# Altium PCB arduino_ext_terminal.PcbDoc (part 1 of 2)
Units mm, origin at the board's own origin, x right, y up, seen from the top; angles counter-clockwise.
Board outline 92.5 x 46.8 mm, 2 copper layers (Top Layer, Bottom Layer), stack 1.036 mm thick; 54 components, 39 nets, 236 pads, 58 vias.
Unrouted connection lines stored in the file: 47.
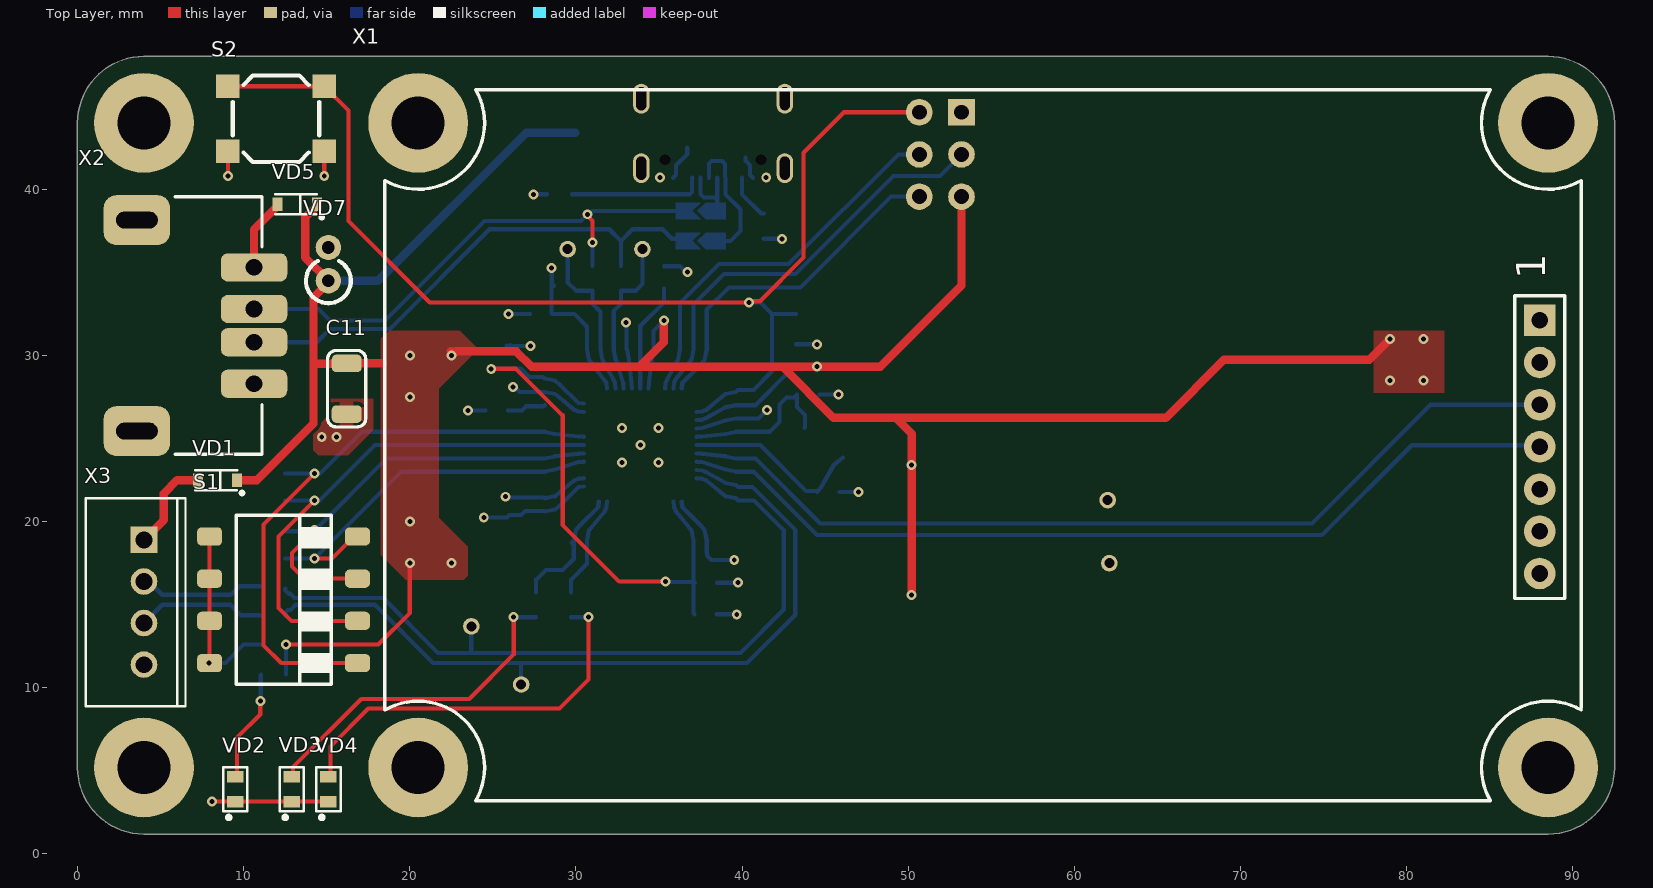
[diagram p0: Top Layer view]
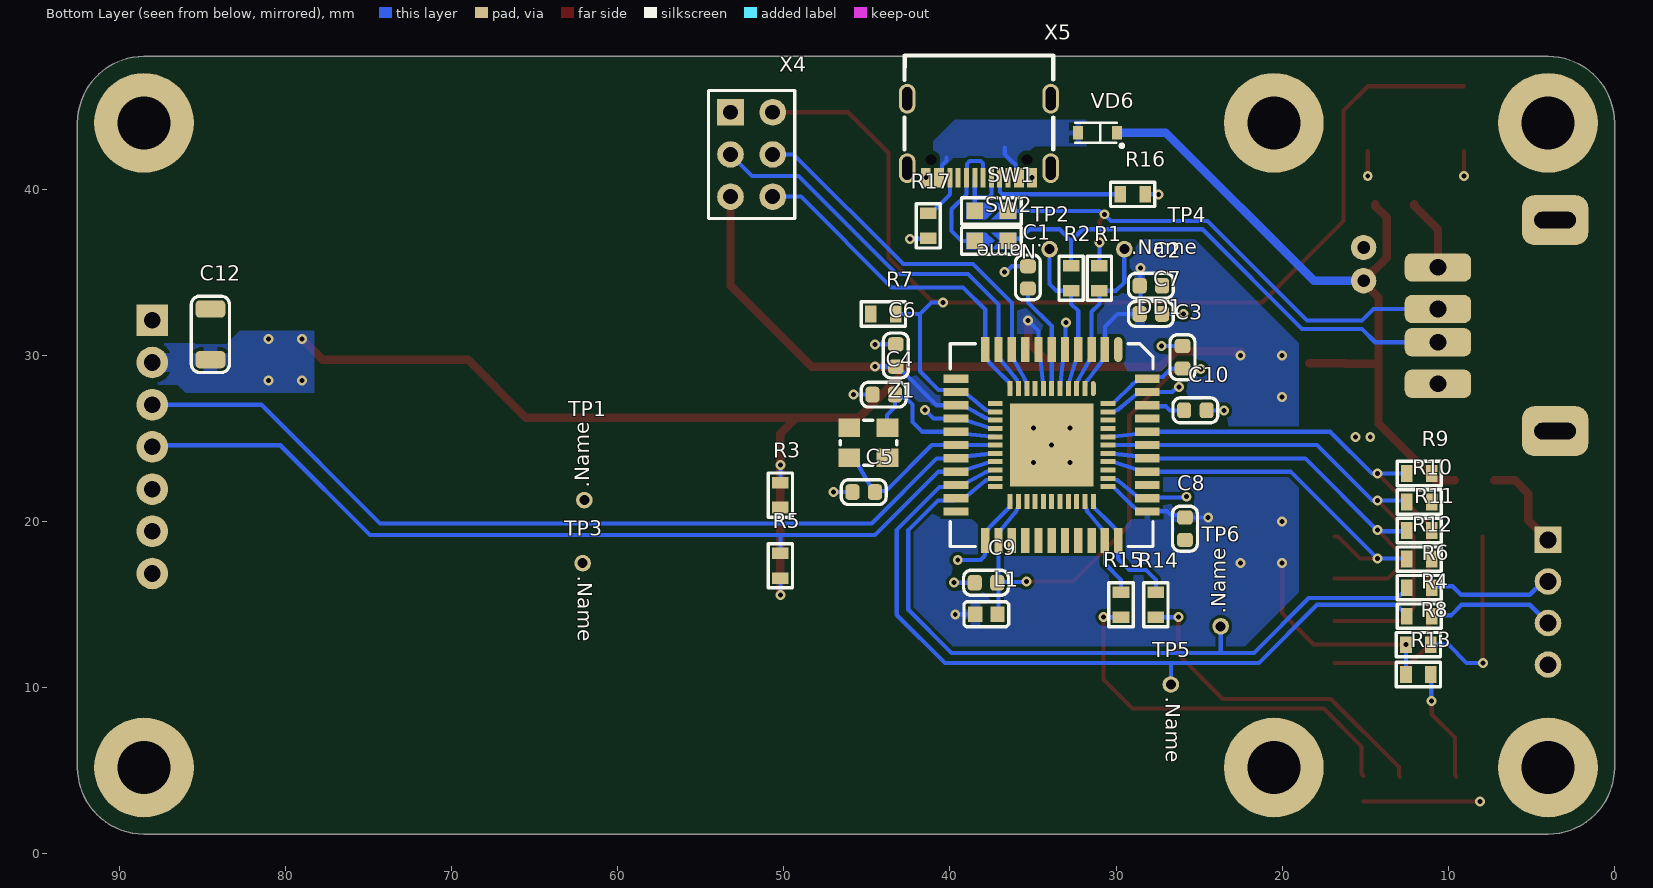
[diagram p1: Bottom Layer view, seen from below]
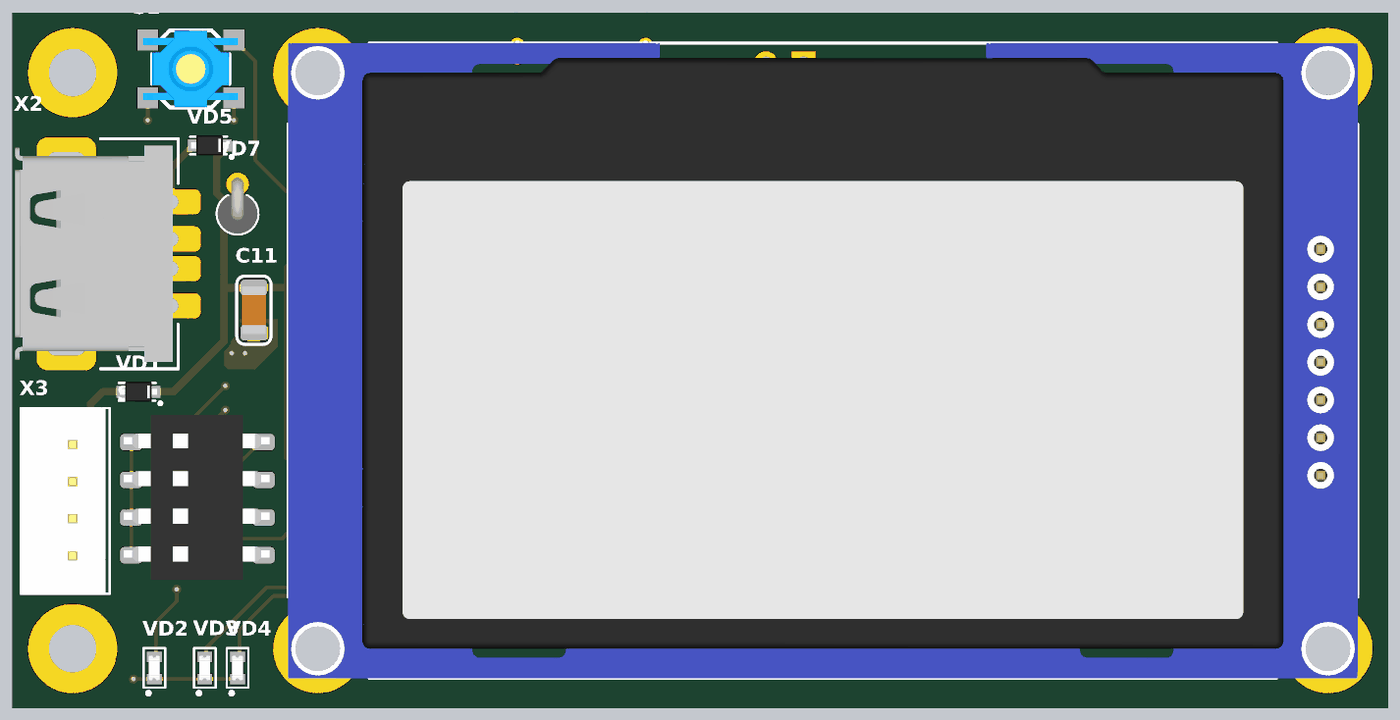
[diagram p3: 3D render of the assembled board from above, using the file's embedded part models]

## Layer stack, top to bottom
Top Solder: solder mask 0.0102, Solder Resist, Dk 3.5
Top Layer: signal copper 0.018
Core 1: core 1, FR4 Tg135, Dk 4.5
Bottom Layer: signal copper 0.018
Bottom Solder: solder mask 0.0102, Solder Resist, Dk 3.5

## Board outline
0,5.2 0,44 cw(c4,44) 4,48 88.5,48 cw(c88.5,44) 92.5,44 92.5,5.2 cw(c88.5,5.2) 88.5,1.2 4,1.2 cw(c4,5.2)

## Design rules (kind name [scope] priority, off if disabled: settings)
AcuteAngle min_acute_angle [OnCopper] p1: minimum=3.50000000000000E+0001 checktracksonly=FALSE // Минимальный угол между примитивами топологии
BoardOutlineClearance board_outline_clearance_std [NOT (OnLayer('Bottom Overlay') OR OnLayer('Top Overlay'))] p1: gap=0.25 ignorepadtopadclearanceinfootprint=FALSE except(0: Arc-SplitContinuation Track-SplitContinuation SMDPad-SplitContinuation THPad-SplitContinuation Via-SplitContinuation Fill-SplitContinuation Poly-SplitContinuation Region-SplitContinuation Text-SplitContinuation) // Отступ элементов топологии от края фрезеруемой печатной платы
Clearance clearance_poly_to_diff [InPolygonClass('FILL') vs InAnyDifferentialPair] p1: gap=0.125 ignorepadtopadclearanceinfootprint=FALSE except(0.2: Arc-Fill Track-Fill SMDPad-SMDPad SMDPad-Fill THPad-Fill Via-Fill Fill-Fill Fill-Poly Poly-Poly Poly-Region Poly-Text; 0.25: Arc-Hole Track-Hole SMDPad-Hole THPad-Hole Via-Hole Fill-Hole Poly-Hole Region-Hole Text-Hole; 0.5: Arc-Poly Track-Poly SMDPad-Poly THPad-Poly Via-Poly) // Отступ полигонов от дифференциальных пар
Clearance clearance_outer_18um_std [OnTopLayer OR OnBottomLayer] p2: gap=0.125 ignorepadtopadclearanceinfootprint=FALSE except(0.2: Arc-Fill Arc-Poly Track-Fill Track-Poly SMDPad-SMDPad SMDPad-Fill SMDPad-Poly THPad-Fill THPad-Poly Via-Fill Via-Poly Fill-Fill Fill-Poly Poly-Poly Poly-Region Poly-Text; 0.25: Arc-Hole Track-Hole SMDPad-Hole THPad-Hole Via-Hole Fill-Hole Poly-Hole Region-Hole Text-Hole) // Зазоры на внешних слоях
Clearance clearance_inner_18um_std [NOT (OnTopLayer Or OnBottomLayer)] p3: gap=0.125 ignorepadtopadclearanceinfootprint=FALSE except(0.2: Arc-Fill Arc-Poly Track-Fill Track-Poly SMDPad-SMDPad SMDPad-Fill SMDPad-Poly THPad-Fill THPad-Poly Via-Fill Via-Poly Fill-Fill Fill-Poly Poly-Poly Poly-Region Poly-Text; 0.25: Arc-Hole Track-Hole SMDPad-Hole THPad-Hole Via-Hole Fill-Hole Poly-Hole Region-Hole Text-Hole) // Зазоры на внутренних слоях
ComponentClearance [All] p1: gap=0 collisioncheckmode=3 verticalgap=0 showdistances=FALSE
DiffPairsRouting diff_pairs_routing [All] p1: maxlimit=0.127 minlimit=0.127 mostfreqgap=0.127 toplayer_minwidth=0.143 toplayer_maxwidth=0.143 toplayer_prefwidth=0.143 bottomlayer_minwidth=0.143 bottomlayer_maxwidth=0.143 bottomlayer_prefwidth=0.143 impedanceprofiledriven=TRUE maxuncoupledlength=12.7 // Правила трассировки дифференциальных пар
HoleSize min_hole_size_std [IsPad] p1: absolutevalues=TRUE maxlimit=5.9 minlimit=0.6 maxpercent=80.000 minpercent=20.000 // Диаметр межслойного переходного отверстия
HoleSize min_hole_size_via_std [IsVia] p2: absolutevalues=TRUE maxlimit=5.9 minlimit=0.3 maxpercent=80.000 minpercent=20.000 // Минимальный диаметр монтажного отверстия
HoleToHoleClearance hole_to_hole_clearance_std [All] p1: gap=0.2 allowstackedmicrovias=FALSE // Минимальное расстояние между краями двух отверстий
MinimumAnnularRing min_via_ar_std [All] p1: minimumring=0.15 // Поясок площадки переходного отверстия (Annular ring VIA)
MinimumAnnularRing min_pad_ar_std [All] p2: minimumring=0.2 // Поясок монтажной контактной площадки (Annular ring PAD)
MinimumSolderMaskSliver min_solder_mask_bridge_std [All] p1: minsoldermaskwidth=0.15 // Мнимальная ширина масочного мостика
PlaneClearance plane_clearance_antipads [InAnyDifferentialPair] p1: clearance=0.5 // Отступ полигона от дифференциальных пар
PlaneClearance plane_clearance_18um_std [All] p2: clearance=0.2 // Отступ полигона (для слоя plane) от элементов топологии
PlaneConnect "plane_connect_to pad<=0.3" [(AsMM(PadXSize_AllLayers)<=0.301) or (AsMM(PadYSize_AllLayers)<=0.301)] p1 off: pad.planeconnectstyle=Relief pad.reliefexpansion=0.2 pad.reliefentries=4 pad.reliefconductorwidth=0.2 pad.reliefairgap=0.2 via.planeconnectstyle=Direct via.reliefexpansion=0.5 via.reliefentries=4 via.reliefconductorwidth=0.2 via.reliefairgap=0.2 // Правила подключения полигонов для падов от 0,3мм и меньше
PlaneConnect "plane_connect_to pad<=0.4" [(AsMM(PadXSize_AllLayers)<=0.401) or (AsMM(PadYSize_AllLayers)<=0.401)] p2 off: pad.planeconnectstyle=Relief pad.reliefexpansion=0.2 pad.reliefentries=4 pad.reliefconductorwidth=0.2 pad.reliefairgap=0.3 via.planeconnectstyle=Direct via.reliefexpansion=0.5 via.reliefentries=4 via.reliefconductorwidth=0.2 via.reliefairgap=0.2 // Правила подключения полигонов для падов от 0,4мм и меньше
PlaneConnect "plane_connect_to pad<=0.6" [(AsMM(PadXSize_AllLayers)<=0.601) or (AsMM(PadYSize_AllLayers)<=0.601)] p3 off: pad.planeconnectstyle=Relief pad.reliefexpansion=0.2 pad.reliefentries=4 pad.reliefconductorwidth=0.3 pad.reliefairgap=0.3 via.planeconnectstyle=Direct via.reliefexpansion=0.5 via.reliefentries=4 via.reliefconductorwidth=0.2 via.reliefairgap=0.2 // Правила подключения полигонов для падов от 0,6мм и меньше
PlaneConnect "plane_connect_to pad<=0.7" [(AsMM(PadXSize_AllLayers)<=0.701) or (AsMM(PadYSize_AllLayers)<=0.701)] p4 off: pad.planeconnectstyle=Relief pad.reliefexpansion=0.6 pad.reliefentries=4 pad.reliefconductorwidth=0.35 pad.reliefairgap=0.3 via.planeconnectstyle=Direct via.reliefexpansion=0.5 via.reliefentries=4 via.reliefconductorwidth=0.2 via.reliefairgap=0.2 // Правила подключения полигонов для падов от 0,7мм и меньше
PlaneConnect "plane_connect_to pad<=0.8" [(AsMM(PadXSize_AllLayers)<=0.801) or (AsMM(PadYSize_AllLayers)<=0.801)] p5 off: pad.planeconnectstyle=Relief pad.reliefexpansion=0.7 pad.reliefentries=4 pad.reliefconductorwidth=0.4 pad.reliefairgap=0.3 via.planeconnectstyle=Direct via.reliefexpansion=0.5 via.reliefentries=4 via.reliefconductorwidth=0.2 via.reliefairgap=0.2 // Правила подключения полигонов для падов от 0,8мм и меньше
PlaneConnect "plane_connect_to pad<=1" [(AsMM(PadXSize_AllLayers)<=1.01) or (AsMM(PadYSize_AllLayers)<=1.01)] p6 off: pad.planeconnectstyle=Relief pad.reliefexpansion=0.8 pad.reliefentries=4 pad.reliefconductorwidth=0.5 pad.reliefairgap=0.3 via.planeconnectstyle=Direct via.reliefexpansion=0.5 via.reliefentries=4 via.reliefconductorwidth=0.2 via.reliefairgap=0.2 // Правила подключения полигонов для падов от 1мм и меньше
PlaneConnect "plane_connect_to pad<=1.3" [(AsMM(PadXSize_AllLayers)<=1.31) or (AsMM(PadYSize_AllLayers)<=1.31)] p7 off: pad.planeconnectstyle=Relief pad.reliefexpansion=1.1 pad.reliefentries=4 pad.reliefconductorwidth=0.65 pad.reliefairgap=0.3 via.planeconnectstyle=Direct via.reliefexpansion=0.5 via.reliefentries=4 via.reliefconductorwidth=0.2 via.reliefairgap=0.2 // Правила подключения полигонов для падов от 1,3мм и меньше
PlaneConnect "plane_connect_to pad<=1.6" [(AsMM(PadXSize_AllLayers)<=1.61) or (AsMM(PadYSize_AllLayers)<=1.61)] p8 off: pad.planeconnectstyle=Relief pad.reliefexpansion=1.4 pad.reliefentries=4 pad.reliefconductorwidth=0.8 pad.reliefairgap=0.3 via.planeconnectstyle=Direct via.reliefexpansion=0.5 via.reliefentries=4 via.reliefconductorwidth=0.2 via.reliefairgap=0.2 // Правила подключения полигонов для падов от 1,6мм и меньше
PlaneConnect "plane_connect_to pad<=1.8" [(AsMM(PadXSize_AllLayers)<=1.81) or (AsMM(PadYSize_AllLayers)<=1.81)] p9 off: pad.planeconnectstyle=Relief pad.reliefexpansion=1.6 pad.reliefentries=4 pad.reliefconductorwidth=0.9 pad.reliefairgap=0.3 via.planeconnectstyle=Direct via.reliefexpansion=0.5 via.reliefentries=4 via.reliefconductorwidth=0.2 via.reliefairgap=0.2 // Правила подключения полигонов для падов от 1,8мм и меньше
PlaneConnect "plane_connect_to pad<=2" [(AsMM(PadXSize_AllLayers)<=2.01) or (AsMM(PadYSize_AllLayers)<=2.01)] p10 off: pad.planeconnectstyle=Relief pad.reliefexpansion=1.8 pad.reliefentries=4 pad.reliefconductorwidth=1 pad.reliefairgap=0.3 via.planeconnectstyle=Direct via.reliefexpansion=0.5 via.reliefentries=4 via.reliefconductorwidth=0.2 via.reliefairgap=0.2 // Правила подключения полигонов для падов от 2мм и меньше
PlaneConnect "plane_connect_to pad<=2.3" [(AsMM(PadXSize_AllLayers)<=2.31) or (AsMM(PadYSize_AllLayers)<=2.31)] p11 off: pad.planeconnectstyle=Relief pad.reliefexpansion=2.1 pad.reliefentries=4 pad.reliefconductorwidth=1.15 pad.reliefairgap=0.3 via.planeconnectstyle=Direct via.reliefexpansion=0.5 via.reliefentries=4 via.reliefconductorwidth=0.2 via.reliefairgap=0.2 // Правила подключения полигонов для падов от 2,3мм и меньше
PlaneConnect "plane_connect_to pad<=2.5" [(AsMM(PadXSize_AllLayers)<=2.51) or (AsMM(PadYSize_AllLayers)<=2.51)] p12 off: pad.planeconnectstyle=Relief pad.reliefexpansion=2.3 pad.reliefentries=4 pad.reliefconductorwidth=1.25 pad.reliefairgap=0.3 via.planeconnectstyle=Direct via.reliefexpansion=0.5 via.reliefentries=4 via.reliefconductorwidth=0.2 via.reliefairgap=0.2 // Правила подключения полигонов для падов от 2,5мм и меньше
PlaneConnect "plane_connect_to pad<=2.7" [(AsMM(PadXSize_AllLayers)<=2.71) or (AsMM(PadYSize_AllLayers)<=2.71)] p13 off: pad.planeconnectstyle=Relief pad.reliefexpansion=2.5 pad.reliefentries=4 pad.reliefconductorwidth=1.35 pad.reliefairgap=0.3 via.planeconnectstyle=Direct via.reliefexpansion=0.5 via.reliefentries=4 via.reliefconductorwidth=0.2 via.reliefairgap=0.2 // Правила подключения полигонов для падов от 2,7мм и меньше
PlaneConnect "plane_connect_to pad<=3" [(AsMM(PadXSize_AllLayers)<=3.01) or (AsMM(PadYSize_AllLayers)<=3.01)] p14 off: pad.planeconnectstyle=Relief pad.reliefexpansion=2.8 pad.reliefentries=4 pad.reliefconductorwidth=1.5 pad.reliefairgap=0.3 via.planeconnectstyle=Direct via.reliefexpansion=0.5 via.reliefentries=4 via.reliefconductorwidth=0.2 via.reliefairgap=0.2 // Правила подключения полигонов для падов от 3мм и меньше
PlaneConnect "plane_connect_to pad<=3.5" [(AsMM(PadXSize_AllLayers)<=3.51) or (AsMM(PadYSize_AllLayers)<=3.51)] p15 off: pad.planeconnectstyle=Relief pad.reliefexpansion=3.3 pad.reliefentries=4 pad.reliefconductorwidth=1.75 pad.reliefairgap=0.4 via.planeconnectstyle=Direct via.reliefexpansion=0.5 via.reliefentries=4 via.reliefconductorwidth=0.2 via.reliefairgap=0.2 // Правила подключения полигонов для падов от 3.5мм и меньше
PlaneConnect "plane_connect_to pad<=4" [(AsMM(PadXSize_AllLayers)<=4.01) or (AsMM(PadYSize_AllLayers)<=4.01)] p16 off: pad.planeconnectstyle=Relief pad.reliefexpansion=3.8 pad.reliefentries=4 pad.reliefconductorwidth=2 pad.reliefairgap=0.4 via.planeconnectstyle=Direct via.reliefexpansion=0.5 via.reliefentries=4 via.reliefconductorwidth=0.2 via.reliefairgap=0.2 // Правила подключения полигонов для падов от 4мм и меньше
PlaneConnect "plane_connect_to pad<=4.5" [(AsMM(PadXSize_AllLayers)<=4.51) or (AsMM(PadYSize_AllLayers)<=4.51)] p17 off: pad.planeconnectstyle=Relief pad.reliefexpansion=4.3 pad.reliefentries=4 pad.reliefconductorwidth=2.25 pad.reliefairgap=0.4 via.planeconnectstyle=Direct via.reliefexpansion=0.5 via.reliefentries=4 via.reliefconductorwidth=0.2 via.reliefairgap=0.2 // Правила подключения полигонов для падов от 4.5мм и меньше
PlaneConnect "plane_connect_to pad<=5" [(AsMM(PadXSize_AllLayers)<=5.01) or (AsMM(PadYSize_AllLayers)<=5.01)] p18 off: pad.planeconnectstyle=Relief pad.reliefexpansion=4.8 pad.reliefentries=4 pad.reliefconductorwidth=2.5 pad.reliefairgap=0.4 via.planeconnectstyle=Direct via.reliefexpansion=0.5 via.reliefentries=4 via.reliefconductorwidth=0.2 via.reliefairgap=0.2 // Правила подключения полигонов для падов от 5мм и меньше
PlaneConnect "plane_connect_to pad<=5.5" [(AsMM(PadXSize_AllLayers)<=5.51) or (AsMM(PadYSize_AllLayers)<=5.51)] p19 off: pad.planeconnectstyle=Relief pad.reliefexpansion=5.3 pad.reliefentries=4 pad.reliefconductorwidth=2.75 pad.reliefairgap=0.4 via.planeconnectstyle=Direct via.reliefexpansion=0.5 via.reliefentries=4 via.reliefconductorwidth=0.2 via.reliefairgap=0.2 // Правила подключения полигонов для падов от 5,5мм и меньше
PlaneConnect "plane_connect_to pad<=6" [(AsMM(PadXSize_AllLayers)<=6.01) or (AsMM(PadYSize_AllLayers)<=6.01)] p20 off: pad.planeconnectstyle=Relief pad.reliefexpansion=5.8 pad.reliefentries=4 pad.reliefconductorwidth=3 pad.reliefairgap=0.5 via.planeconnectstyle=Direct via.reliefexpansion=0.5 via.reliefentries=4 via.reliefconductorwidth=0.2 via.reliefairgap=0.2 // Правила подключения полигонов для падов от 6мм и меньше
PlaneConnect "plane_connect_to pad<=6.5" [(AsMM(PadXSize_AllLayers)<=6.51) or (AsMM(PadYSize_AllLayers)<=6.51)] p21 off: pad.planeconnectstyle=Relief pad.reliefexpansion=6.3 pad.reliefentries=4 pad.reliefconductorwidth=3.25 pad.reliefairgap=0.5 via.planeconnectstyle=Direct via.reliefexpansion=0.5 via.reliefentries=4 via.reliefconductorwidth=0.2 via.reliefairgap=0.2 // Правила подключения полигонов для падов от 6,5мм и меньше
PlaneConnect "plane_connect_to pad<=7" [(AsMM(PadXSize_AllLayers)<=7.01) or (AsMM(PadYSize_AllLayers)<=7.01)] p22 off: pad.planeconnectstyle=Relief pad.reliefexpansion=6.8 pad.reliefentries=4 pad.reliefconductorwidth=3.5 pad.reliefairgap=0.5 via.planeconnectstyle=Direct via.reliefexpansion=0.5 via.reliefentries=4 via.reliefconductorwidth=0.2 via.reliefairgap=0.2 // Правила подключения полигонов для падов от 7мм и меньше
PlaneConnect "plane_connect_to pad<=7.5" [(AsMM(PadXSize_AllLayers)<=7.51) or (AsMM(PadYSize_AllLayers)<=7.51)] p23 off: pad.planeconnectstyle=Relief pad.reliefexpansion=7.3 pad.reliefentries=4 pad.reliefconductorwidth=3.75 pad.reliefairgap=0.5 via.planeconnectstyle=Direct via.reliefexpansion=0.5 via.reliefentries=4 via.reliefconductorwidth=0.2 via.reliefairgap=0.2 // Правила подключения полигонов для падов от 7,5мм и меньше
PlaneConnect "plane_connect_to pad<=8" [(AsMM(PadXSize_AllLayers)<=8.01) or (AsMM(PadYSize_AllLayers)<=8.01)] p24 off: pad.planeconnectstyle=Relief pad.reliefexpansion=7.8 pad.reliefentries=4 pad.reliefconductorwidth=4 pad.reliefairgap=0.5 via.planeconnectstyle=Direct via.reliefexpansion=0.5 via.reliefentries=4 via.reliefconductorwidth=0.2 via.reliefairgap=0.2 // Правила подключения полигонов для падов от 8мм и меньше
PlaneConnect "plane_connect_to pad<=8.5" [(AsMM(PadXSize_AllLayers)<=8.51) or (AsMM(PadYSize_AllLayers)<=8.51)] p25 off: pad.planeconnectstyle=Relief pad.reliefexpansion=8.3 pad.reliefentries=4 pad.reliefconductorwidth=4.25 pad.reliefairgap=0.5 via.planeconnectstyle=Direct via.reliefexpansion=0.5 via.reliefentries=4 via.reliefconductorwidth=0.2 via.reliefairgap=0.2 // Правила подключения полигонов для падов от 8,5мм и меньше
PlaneConnect "plane_connect_to pad<=9" [(AsMM(PadXSize_AllLayers)<=9.01) or (AsMM(PadYSize_AllLayers)<=9.01)] p26 off: pad.planeconnectstyle=Relief pad.reliefexpansion=8.8 pad.reliefentries=4 pad.reliefconductorwidth=4.5 pad.reliefairgap=0.5 via.planeconnectstyle=Direct via.reliefexpansion=0.5 via.reliefentries=4 via.reliefconductorwidth=0.2 via.reliefairgap=0.2 // Правила подключения полигонов для падов от 9мм и меньше
PlaneConnect "plane_connect_to pad<=9.5" [(AsMM(PadXSize_AllLayers)<=9.51) or (AsMM(PadYSize_AllLayers)<=9.51)] p27 off: pad.planeconnectstyle=Relief pad.reliefexpansion=9.3 pad.reliefentries=4 pad.reliefconductorwidth=4.75 pad.reliefairgap=0.5 via.planeconnectstyle=Direct via.reliefexpansion=0.5 via.reliefentries=4 via.reliefconductorwidth=0.2 via.reliefairgap=0.2 // Правила подключения полигонов для падов от 9,5мм и меньше
PlaneConnect "plane_connect_to pad<=10" [(AsMM(PadXSize_AllLayers)<=10.01) or (AsMM(PadYSize_AllLayers)<=10.01)] p28 off: pad.planeconnectstyle=Relief pad.reliefexpansion=9.8 pad.reliefentries=4 pad.reliefconductorwidth=5 pad.reliefairgap=0.5 via.planeconnectstyle=Direct via.reliefexpansion=0.5 via.reliefentries=4 via.reliefconductorwidth=0.2 via.reliefairgap=0.2 // Правила подключения полигонов для падов от 10мм и меньше
PlaneConnect plane_connect_to_pad [All] p29 off: pad.planeconnectstyle=Relief pad.reliefexpansion=0.5 pad.reliefentries=4 pad.reliefconductorwidth=0.2 pad.reliefairgap=0.2 via.planeconnectstyle=Direct via.reliefexpansion=0.5 via.reliefentries=4 via.reliefconductorwidth=0.2 via.reliefairgap=0.2 // Правила подключения полигонов общие
PolygonConnect poly_connect_direct [InPolygonClass('DIRECT')] p1: connectstyle=Direct reliefconductorwidth=0.254 reliefentries=4 polygonreliefangle="90 Angle" airgapwidth=0.254 // Подключение без термобарьеров к полигонам, относящимся к классу DIRECT
PolygonConnect poly_connect_to_pad<=0.3 [(AsMM(PadXSize_AllLayers)<=0.301) or (AsMM(PadYSize_AllLayers)<=0.301)] p2: thpad.connectstyle=Relief thpad.reliefconductorwidth=0.2 thpad.reliefentries=4 thpad.polygonreliefangle="90 Angle" thpad.airgapwidth=0.2 smdpad.connectstyle=Relief smdpad.reliefconductorwidth=0.2 smdpad.reliefentries=4 smdpad.polygonreliefangle="90 Angle" smdpad.airgapwidth=0.2 via.connectstyle=Direct via.reliefconductorwidth=0.254 via.reliefentries=4 via.polygonreliefangle="90 Angle" via.airgapwidth=0.254 // Правила подключения полигонов для падов от 0,3мм и меньше
PolygonConnect poly_connect_to_pad<=0.4 [(AsMM(PadXSize_AllLayers)<=0.401) or (AsMM(PadYSize_AllLayers)<=0.401)] p3: thpad.connectstyle=Relief thpad.reliefconductorwidth=0.26 thpad.reliefentries=4 thpad.polygonreliefangle="90 Angle" thpad.airgapwidth=0.2 smdpad.connectstyle=Relief smdpad.reliefconductorwidth=0.26 smdpad.reliefentries=4 smdpad.polygonreliefangle="90 Angle" smdpad.airgapwidth=0.2 via.connectstyle=Direct via.reliefconductorwidth=0.254 via.reliefentries=4 via.polygonreliefangle="90 Angle" via.airgapwidth=0.254 // Правила подключения полигонов для падов от 0,4 и меньше
PolygonConnect poly_connect_to_pad<=0.6 [(AsMM(PadXSize_AllLayers)<=0.601) or (AsMM(PadYSize_AllLayers)<=0.601)] p4: thpad.connectstyle=Relief thpad.reliefconductorwidth=0.33 thpad.reliefentries=4 thpad.polygonreliefangle="90 Angle" thpad.airgapwidth=0.2 smdpad.connectstyle=Relief smdpad.reliefconductorwidth=0.33 smdpad.reliefentries=4 smdpad.polygonreliefangle="90 Angle" smdpad.airgapwidth=0.2 via.connectstyle=Direct via.reliefconductorwidth=0.254 via.reliefentries=4 via.polygonreliefangle="90 Angle" via.airgapwidth=0.254 // Правила подключения полигонов для падов от 0,6мм и меньше
PolygonConnect poly_connect_to_pad<=0.7 [(AsMM(PadXSize_AllLayers)<=0.701) or (AsMM(PadYSize_AllLayers)<=0.701)] p5: thpad.connectstyle=Relief thpad.reliefconductorwidth=0.46 thpad.reliefentries=4 thpad.polygonreliefangle="90 Angle" thpad.airgapwidth=0.2 smdpad.connectstyle=Relief smdpad.reliefconductorwidth=0.46 smdpad.reliefentries=4 smdpad.polygonreliefangle="90 Angle" smdpad.airgapwidth=0.2 via.connectstyle=Direct via.reliefconductorwidth=0.254 via.reliefentries=4 via.polygonreliefangle="90 Angle" via.airgapwidth=0.254 // Правила подключения полигонов для падов от 0,7мм и меньше
PolygonConnect poly_connect_to_pad<=0.8 [(AsMM(PadXSize_AllLayers)<=0.8)or(AsMM(PadYSize_AllLayers)<=0.8)] p6: thpad.connectstyle=Relief thpad.reliefconductorwidth=0.53 thpad.reliefentries=4 thpad.polygonreliefangle="90 Angle" thpad.airgapwidth=0.3 smdpad.connectstyle=Relief smdpad.reliefconductorwidth=0.53 smdpad.reliefentries=4 smdpad.polygonreliefangle="90 Angle" smdpad.airgapwidth=0.2 via.connectstyle=Direct via.reliefconductorwidth=0.254 via.reliefentries=4 via.polygonreliefangle="90 Angle" via.airgapwidth=0.254 // Правила подключения полигонов для падов от 0,8мм и меньше
PolygonConnect poly_connect_to_pad<=1 [(AsMM(PadXSize_AllLayers)<=1.01)or(AsMM(PadYSize_AllLayers)<=1.01)] p7: thpad.connectstyle=Relief thpad.reliefconductorwidth=0.6 thpad.reliefentries=4 thpad.polygonreliefangle="90 Angle" thpad.airgapwidth=0.3 smdpad.connectstyle=Relief smdpad.reliefconductorwidth=0.6 smdpad.reliefentries=4 smdpad.polygonreliefangle="90 Angle" smdpad.airgapwidth=0.2 via.connectstyle=Direct via.reliefconductorwidth=0.254 via.reliefentries=4 via.polygonreliefangle="90 Angle" via.airgapwidth=0.254 // Правила подключения полигонов для падов от 1мм и меньше
PolygonConnect poly_connect_to_pad<=1.3 [(AsMM(PadXSize_AllLayers)<=1.31)or(AsMM(PadYSize_AllLayers)<=1.31)] p8: thpad.connectstyle=Relief thpad.reliefconductorwidth=0.66 thpad.reliefentries=4 thpad.polygonreliefangle="90 Angle" thpad.airgapwidth=0.3 smdpad.connectstyle=Relief smdpad.reliefconductorwidth=0.86 smdpad.reliefentries=4 smdpad.polygonreliefangle="90 Angle" smdpad.airgapwidth=0.2 via.connectstyle=Direct via.reliefconductorwidth=0.254 via.reliefentries=4 via.polygonreliefangle="90 Angle" via.airgapwidth=0.254 // Правила подключения полигонов для падов от 1,3мм и меньше
PolygonConnect poly_connect_to_pad<=1.6 [(AsMM(PadXSize_AllLayers)<=1.61)or(AsMM(PadYSize_AllLayers)<=1.61)] p9: thpad.connectstyle=Relief thpad.reliefconductorwidth=0.8 thpad.reliefentries=4 thpad.polygonreliefangle="90 Angle" thpad.airgapwidth=0.3 smdpad.connectstyle=Relief smdpad.reliefconductorwidth=1 smdpad.reliefentries=4 smdpad.polygonreliefangle="90 Angle" smdpad.airgapwidth=0.2 via.connectstyle=Direct via.reliefconductorwidth=0.254 via.reliefentries=4 via.polygonreliefangle="90 Angle" via.airgapwidth=0.254 // Правила подключения полигонов для падов от 1,6мм и меньше
PolygonConnect poly_connect_to_pad<=1.8 [(AsMM(PadXSize_AllLayers)<=1.8)or(AsMM(PadYSize_AllLayers)<=1.8)] p10: thpad.connectstyle=Relief thpad.reliefconductorwidth=1 thpad.reliefentries=4 thpad.polygonreliefangle="90 Angle" thpad.airgapwidth=0.3 smdpad.connectstyle=Relief smdpad.reliefconductorwidth=1.2 smdpad.reliefentries=4 smdpad.polygonreliefangle="90 Angle" smdpad.airgapwidth=0.2 via.connectstyle=Direct via.reliefconductorwidth=0.254 via.reliefentries=4 via.polygonreliefangle="90 Angle" via.airgapwidth=0.254 // Правила подключения полигонов для падов от 1,8мм и меньше
PolygonConnect poly_connect_to_pad<=2 [(AsMM(PadXSize_AllLayers)<=2.01)or(AsMM(PadYSize_AllLayers)<=2.01)] p11: thpad.connectstyle=Relief thpad.reliefconductorwidth=1.1 thpad.reliefentries=4 thpad.polygonreliefangle="90 Angle" thpad.airgapwidth=0.3 smdpad.connectstyle=Relief smdpad.reliefconductorwidth=1.4 smdpad.reliefentries=4 smdpad.polygonreliefangle="90 Angle" smdpad.airgapwidth=0.2 via.connectstyle=Direct via.reliefconductorwidth=0.254 via.reliefentries=4 via.polygonreliefangle="90 Angle" via.airgapwidth=0.254 // Правила подключения полигонов для падов от 2мм и меньше
PolygonConnect poly_connect_to_pad<=2.3 [(AsMM(PadXSize_AllLayers)<=2.31)or(AsMM(PadYSize_AllLayers)<=2.31)] p12: thpad.connectstyle=Relief thpad.reliefconductorwidth=1.2 thpad.reliefentries=4 thpad.polygonreliefangle="90 Angle" thpad.airgapwidth=0.3 smdpad.connectstyle=Relief smdpad.reliefconductorwidth=1.4 smdpad.reliefentries=4 smdpad.polygonreliefangle="90 Angle" smdpad.airgapwidth=0.2 via.connectstyle=Direct via.reliefconductorwidth=0.254 via.reliefentries=4 via.polygonreliefangle="90 Angle" via.airgapwidth=0.254 // Правила подключения полигонов для падов от 2,3мм и меньше
PolygonConnect poly_connect_to_pad<=2.5 [(AsMM(PadXSize_AllLayers)<=2.51)or(AsMM(PadYSize_AllLayers)<=2.51)] p13: thpad.connectstyle=Relief thpad.reliefconductorwidth=1.2 thpad.reliefentries=4 thpad.polygonreliefangle="90 Angle" thpad.airgapwidth=0.3 smdpad.connectstyle=Relief smdpad.reliefconductorwidth=1.4 smdpad.reliefentries=4 smdpad.polygonreliefangle="90 Angle" smdpad.airgapwidth=0.2 via.connectstyle=Direct via.reliefconductorwidth=0.254 via.reliefentries=4 via.polygonreliefangle="90 Angle" via.airgapwidth=0.254 // Правила подключения полигонов для падов от 2,5мм и меньше
PolygonConnect poly_connect_to_pad<=2.7 [(AsMM(PadXSize_AllLayers)<=2.71)or(AsMM(PadYSize_AllLayers)<=2.71)] p14: thpad.connectstyle=Relief thpad.reliefconductorwidth=1.4 thpad.reliefentries=4 thpad.polygonreliefangle="90 Angle" thpad.airgapwidth=0.3 smdpad.connectstyle=Relief smdpad.reliefconductorwidth=1.6 smdpad.reliefentries=4 smdpad.polygonreliefangle="90 Angle" smdpad.airgapwidth=0.2 via.connectstyle=Direct via.reliefconductorwidth=0.254 via.reliefentries=4 via.polygonreliefangle="90 Angle" via.airgapwidth=0.254 // Правила подключения полигонов для падов от 2,7мм и меньше
PolygonConnect poly_connect_to_pad<=3 [(AsMM(PadXSize_AllLayers)<=3.01)or(AsMM(PadYSize_AllLayers)<=3.01)] p15: thpad.connectstyle=Relief thpad.reliefconductorwidth=1.6 thpad.reliefentries=4 thpad.polygonreliefangle="90 Angle" thpad.airgapwidth=0.3 smdpad.connectstyle=Relief smdpad.reliefconductorwidth=1.8 smdpad.reliefentries=4 smdpad.polygonreliefangle="90 Angle" smdpad.airgapwidth=0.2 via.connectstyle=Direct via.reliefconductorwidth=0.254 via.reliefentries=4 via.polygonreliefangle="90 Angle" via.airgapwidth=0.254 // Правила подключения полигонов для падов от 3мм и меньше
PolygonConnect poly_connect_to_pad<=3.5 [(AsMM(PadXSize_AllLayers)<=3.51)or(AsMM(PadYSize_AllLayers)<=3.51)] p16: thpad.connectstyle=Relief thpad.reliefconductorwidth=1.8 thpad.reliefentries=4 thpad.polygonreliefangle="90 Angle" thpad.airgapwidth=0.4 smdpad.connectstyle=Relief smdpad.reliefconductorwidth=2 smdpad.reliefentries=4 smdpad.polygonreliefangle="90 Angle" smdpad.airgapwidth=0.3 via.connectstyle=Direct via.reliefconductorwidth=0.254 via.reliefentries=4 via.polygonreliefangle="90 Angle" via.airgapwidth=0.254 // Правила подключения полигонов для падов от 3,5мм и меньше
PolygonConnect poly_connect_to_pad<=4 [(AsMM(PadXSize_AllLayers)<=4.01)or(AsMM(PadYSize_AllLayers)<=4.01)] p17: thpad.connectstyle=Relief thpad.reliefconductorwidth=2.1 thpad.reliefentries=4 thpad.polygonreliefangle="90 Angle" thpad.airgapwidth=0.4 smdpad.connectstyle=Relief smdpad.reliefconductorwidth=2.3 smdpad.reliefentries=4 smdpad.polygonreliefangle="90 Angle" smdpad.airgapwidth=0.3 via.connectstyle=Direct via.reliefconductorwidth=0.254 via.reliefentries=4 via.polygonreliefangle="90 Angle" via.airgapwidth=0.254 // Правила подключения полигонов для падов от 4мм и меньше
PolygonConnect poly_connect_to_pad<=4.5 [(AsMM(PadXSize_AllLayers)<=4.51)or(AsMM(PadYSize_AllLayers)<=4.51)] p18: thpad.connectstyle=Relief thpad.reliefconductorwidth=2.35 thpad.reliefentries=4 thpad.polygonreliefangle="90 Angle" thpad.airgapwidth=0.4 smdpad.connectstyle=Relief smdpad.reliefconductorwidth=2.55 smdpad.reliefentries=4 smdpad.polygonreliefangle="90 Angle" smdpad.airgapwidth=0.3 via.connectstyle=Direct via.reliefconductorwidth=0.254 via.reliefentries=4 via.polygonreliefangle="90 Angle" via.airgapwidth=0.254 // Правила подключения полигонов для падов от 4.5мм и меньше
PolygonConnect poly_connect_to_pad<=5 [(AsMM(PadXSize_AllLayers)<=5.01)or(AsMM(PadYSize_AllLayers)<=5.01)] p19: thpad.connectstyle=Relief thpad.reliefconductorwidth=2.6 thpad.reliefentries=4 thpad.polygonreliefangle="90 Angle" thpad.airgapwidth=0.4 smdpad.connectstyle=Relief smdpad.reliefconductorwidth=2.8 smdpad.reliefentries=4 smdpad.polygonreliefangle="90 Angle" smdpad.airgapwidth=0.3 via.connectstyle=Direct via.reliefconductorwidth=0.254 via.reliefentries=4 via.polygonreliefangle="90 Angle" via.airgapwidth=0.254 // Правила подключения полигонов для падов от 5мм и меньше
PolygonConnect poly_connect_to_pad<=5.5 [(AsMM(PadXSize_AllLayers)<=5.51)or(AsMM(PadYSize_AllLayers)<=5.51)] p20: thpad.connectstyle=Relief thpad.reliefconductorwidth=2.85 thpad.reliefentries=4 thpad.polygonreliefangle="90 Angle" thpad.airgapwidth=0.4 smdpad.connectstyle=Relief smdpad.reliefconductorwidth=3.05 smdpad.reliefentries=4 smdpad.polygonreliefangle="90 Angle" smdpad.airgapwidth=0.3 via.connectstyle=Direct via.reliefconductorwidth=0.254 via.reliefentries=4 via.polygonreliefangle="90 Angle" via.airgapwidth=0.254 // Правила подключения полигонов для падов от 5.5мм и меньше
PolygonConnect poly_connect_to_pad<=6 [(AsMM(PadXSize_AllLayers)<=6.01)or(AsMM(PadYSize_AllLayers)<=6.01)] p21: thpad.connectstyle=Relief thpad.reliefconductorwidth=3.1 thpad.reliefentries=4 thpad.polygonreliefangle="90 Angle" thpad.airgapwidth=0.5 smdpad.connectstyle=Relief smdpad.reliefconductorwidth=3.3 smdpad.reliefentries=4 smdpad.polygonreliefangle="90 Angle" smdpad.airgapwidth=0.4 via.connectstyle=Direct via.reliefconductorwidth=0.254 via.reliefentries=4 via.polygonreliefangle="90 Angle" via.airgapwidth=0.254 // Правила подключения полигонов для падов от 6мм и меньше
PolygonConnect poly_connect_to_pad<=6.5 [(AsMM(PadXSize_AllLayers)<=6.51)or(AsMM(PadYSize_AllLayers)<=6.51)] p22: thpad.connectstyle=Relief thpad.reliefconductorwidth=3.4 thpad.reliefentries=4 thpad.polygonreliefangle="90 Angle" thpad.airgapwidth=0.5 smdpad.connectstyle=Relief smdpad.reliefconductorwidth=3.6 smdpad.reliefentries=4 smdpad.polygonreliefangle="90 Angle" smdpad.airgapwidth=0.4 via.connectstyle=Direct via.reliefconductorwidth=0.254 via.reliefentries=4 via.polygonreliefangle="90 Angle" via.airgapwidth=0.254 // Правила подключения полигонов для падов от 6,5мм и меньше
PolygonConnect poly_connect_to_pad<=7 [(AsMM(PadXSize_AllLayers)<7.01)or(AsMM(PadYSize_AllLayers)<=7.01)] p23: thpad.connectstyle=Relief thpad.reliefconductorwidth=3.6 thpad.reliefentries=4 thpad.polygonreliefangle="90 Angle" thpad.airgapwidth=0.5 smdpad.connectstyle=Relief smdpad.reliefconductorwidth=3.8 smdpad.reliefentries=4 smdpad.polygonreliefangle="90 Angle" smdpad.airgapwidth=0.4 via.connectstyle=Direct via.reliefconductorwidth=0.254 via.reliefentries=4 via.polygonreliefangle="90 Angle" via.airgapwidth=0.254 // Правила подключения полигонов для падов от 7мм и меньше
PolygonConnect poly_connect_to_pad<=7.5 [(AsMM(PadXSize_AllLayers)<7.51)or(AsMM(PadYSize_AllLayers)<=7.51)] p24: thpad.connectstyle=Relief thpad.reliefconductorwidth=3.9 thpad.reliefentries=4 thpad.polygonreliefangle="90 Angle" thpad.airgapwidth=0.5 smdpad.connectstyle=Relief smdpad.reliefconductorwidth=4.1 smdpad.reliefentries=4 smdpad.polygonreliefangle="90 Angle" smdpad.airgapwidth=0.4 via.connectstyle=Direct via.reliefconductorwidth=0.254 via.reliefentries=4 via.polygonreliefangle="90 Angle" via.airgapwidth=0.254 // Правила подключения полигонов для падов от 7,5мм и меньше
PolygonConnect poly_connect_to_pad<=8 [(AsMM(PadXSize_AllLayers)<8.01)or(AsMM(PadYSize_AllLayers)<=8.01)] p25: thpad.connectstyle=Relief thpad.reliefconductorwidth=4.15 thpad.reliefentries=4 thpad.polygonreliefangle="90 Angle" thpad.airgapwidth=0.5 smdpad.connectstyle=Relief smdpad.reliefconductorwidth=4.35 smdpad.reliefentries=4 smdpad.polygonreliefangle="90 Angle" smdpad.airgapwidth=0.5 via.connectstyle=Direct via.reliefconductorwidth=0.254 via.reliefentries=4 via.polygonreliefangle="90 Angle" via.airgapwidth=0.254 // Правила подключения полигонов для падов от 8мм и меньше
PolygonConnect poly_connect_to_pad<=8.5 [(AsMM(PadXSize_AllLayers)<8.51)or(AsMM(PadYSize_AllLayers)<=8.51)] p26: thpad.connectstyle=Relief thpad.reliefconductorwidth=4.4 thpad.reliefentries=4 thpad.polygonreliefangle="90 Angle" thpad.airgapwidth=0.5 smdpad.connectstyle=Relief smdpad.reliefconductorwidth=4.6 smdpad.reliefentries=4 smdpad.polygonreliefangle="90 Angle" smdpad.airgapwidth=0.4 via.connectstyle=Direct via.reliefconductorwidth=0.254 via.reliefentries=4 via.polygonreliefangle="90 Angle" via.airgapwidth=0.254 // Правила подключения полигонов для падов от 8,5мм и меньше
PolygonConnect poly_connect_to_pad<=9 [(AsMM(PadXSize_AllLayers)<9.01)or(AsMM(PadYSize_AllLayers)<=9.01)] p27: thpad.connectstyle=Relief thpad.reliefconductorwidth=4.7 thpad.reliefentries=4 thpad.polygonreliefangle="90 Angle" thpad.airgapwidth=0.5 smdpad.connectstyle=Relief smdpad.reliefconductorwidth=4.9 smdpad.reliefentries=4 smdpad.polygonreliefangle="90 Angle" smdpad.airgapwidth=0.4 via.connectstyle=Direct via.reliefconductorwidth=0.254 via.reliefentries=4 via.polygonreliefangle="90 Angle" via.airgapwidth=0.254 // Правила подключения полигонов для падов от 9мм и меньше
PolygonConnect poly_connect_to_pad<=9.5 [(AsMM(PadXSize_AllLayers)<9.51)or(AsMM(PadYSize_AllLayers)<=9.51)] p28: thpad.connectstyle=Relief thpad.reliefconductorwidth=5 thpad.reliefentries=4 thpad.polygonreliefangle="90 Angle" thpad.airgapwidth=0.5 smdpad.connectstyle=Relief smdpad.reliefconductorwidth=5.2 smdpad.reliefentries=4 smdpad.polygonreliefangle="90 Angle" smdpad.airgapwidth=0.4 via.connectstyle=Direct via.reliefconductorwidth=0.254 via.reliefentries=4 via.polygonreliefangle="90 Angle" via.airgapwidth=0.254 // Правила подключения полигонов для падов от 9,5мм и меньше
PolygonConnect poly_connect_to_pad<=10 [(AsMM(PadXSize_AllLayers)<7.51)or(AsMM(PadYSize_AllLayers)<=7.51)] p29: thpad.connectstyle=Relief thpad.reliefconductorwidth=5.2 thpad.reliefentries=4 thpad.polygonreliefangle="90 Angle" thpad.airgapwidth=0.5 smdpad.connectstyle=Relief smdpad.reliefconductorwidth=5.4 smdpad.reliefentries=4 smdpad.polygonreliefangle="90 Angle" smdpad.airgapwidth=0.4 via.connectstyle=Direct via.reliefconductorwidth=0.254 via.reliefentries=4 via.polygonreliefangle="90 Angle" via.airgapwidth=0.254 // Правила подключения полигонов для падов от 10мм и меньше
PolygonConnect poly_connect_to_pad [All] p30: thpad.connectstyle=Relief thpad.reliefconductorwidth=0.25 thpad.reliefentries=4 thpad.polygonreliefangle="90 Angle" thpad.airgapwidth=0.2 smdpad.connectstyle=Relief smdpad.reliefconductorwidth=0.25 smdpad.reliefentries=4 smdpad.polygonreliefangle="90 Angle" smdpad.airgapwidth=0.2 via.connectstyle=Direct via.reliefconductorwidth=0.25 via.reliefentries=4 via.polygonreliefangle="90 Angle" via.airgapwidth=0.2 // Правила подключения полигонов общие
RoutingCorners [All] p1 off: cornerstyle=45-Degree minsetback=2.5 maxsetback=2.5
RoutingVias [All] p1: holewidth=0.3 width=0.6 viastyle="Through Hole" minholewidth=0.3 minwidth=0.6 maxholewidth=5.9 maxwidth=6.4
SilkToSilkClearance silk_to_silk_clearance_std [All] p1 off: silktosilkclearance=0.15 // Отступ текста шелкографии от других примитивов шелкографии
SilkToSolderMaskClearance silk_to_solder_mask_clearance_std [IsPad] p1 off: minsilkscreentomaskgap=0.15 clearancetoexposedcopper=FALSE // Минимальное расстояние между элементами шелкографии и вскрытой медью
SolderMaskExpansion solder_mask_expansion_std [All] p1: expansion=0.05 istentingtop=FALSE // Припуск паяльной масски
UnRoutedNet [All] p1: checkbadconnections=TRUE
Width width_18um_std [All] p1: maxlimit=10 minlimit=0.125 preferedwidth=0.15 checkconnectedcopper=TRUE // Ширина проводников (общая)
19 further rules are at their usual default settings.

## Components (designator, comment, footprint, x,y, rotation, side; value= is the part's Value field where it differs from the comment)
C1 "1мк" C0603 35.3,34.7 r270 bottom
C2 "4,7мк" C0603 27.9,34.2 r0 bottom
C3 "0,1мк" C0603 26,29.9 r270 bottom
C4 "22" C0603 43.981,27.649 r0 bottom
C5 "22" C0603 45.183,21.78 r0 bottom
C6 "0,1мк" C0603 43.25,30 r270 bottom
C7 "0,1мк" C0603 27.9,32.5 r0 bottom
C8 "0,1мк" C0603 25.85,19.575 r90 bottom
C9 "0,1мк" C0603 37.825,16.325 r180 bottom
C10 "0,1мк" C0603 25.225,26.7 r0 bottom
C11 "0,033мк" C1206 16.2,28 r90 top
C12 "0,033мк" C1206 84.5,31.275 r90 bottom
DD1 "ATmega32u4" UNIVERSAL_ATMEGA32U4 33.869,24.609 r270 bottom
L1 "BLM18PG181SN1D" L0603 37.8,14.425 r0 bottom
R1 "22" R0603 31,34.65 r270 bottom
R2 "22" R0603 32.7,34.65 r270 bottom
R3 "10к" R0603 50.2,21.6 r90 bottom
R4 "120" R0603 11.75,14.317 r0 bottom
R5 "10к" R0603 50.2,17.35 r270 bottom
R6 "120" R0603 11.75,16.033 r0 bottom
R7 "10к" R0603 44,32.5 r0 bottom
R8 "1к" R0603 11.8,12.6 r0 bottom
R9 "10к" R0603 11.75,22.9 r0 bottom
R10 "10к" R0603 11.75,21.183 r0 bottom
R11 "10к" R0603 11.75,19.467 r0 bottom
R12 "10к" R0603 11.75,17.75 r0 bottom
R13 "510" R0603 11.8,10.8 r0 bottom
R14 "510" R0603 27.6,15 r270 bottom
R15 "510" R0603 29.7,15 r270 bottom
R16 "5,1к" R0603 29,39.7 r180 bottom
R17 "5,1к" R0603 41.3,37.8 r270 bottom
S1 "" A6S-4102-H 12.4,15.3 r180 top
S2 "IT-1187" it-1187 11.95,44.25 r0 top
SW1 "" JUMPER_SOLDERED_3x1 37.5,38.7 r180 bottom
SW2 "" JUMPER_SOLDERED_3x1 37.5,36.9 r180 bottom
TP1 "SCL" TP_0,6X1 62,21.3 r90 bottom
TP2 "USB_Dp" TP_0,6X1 34,36.4 r0 bottom
TP3 "SDA" TP_0,6X1 62.1,17.5 r270 bottom
TP4 "USB_Dn" TP_0,6X1 29.5,36.4 r180 bottom
TP5 "RX" TP_0,6X1 26.7,10.2 r270 bottom
TP6 "TX" TP_0,6X1 23.7,13.7 r90 bottom
VD1 "1N5817WS" SOD323 8,22.5 r180 top
VD2 "Зеленый светодиод" VD0603 9.5,3.9 r270 top
VD3 "Синий светодиод" VD0603 12.9,3.9 r270 top
VD4 "Синий светодиод" VD0603 15.1,3.9 r270 top
VD5 "1N5817WS" SOD323 12.8,39.1 r180 top
VD6 "1N5817WS" SOD323 31.55,43.4 r0 bottom
VD7 "1N4734A" "DO-41 Vertical" 15.1,34.5 r0 top
X1 "OLED2.42" OLED2.42-PLS2.54-1x7 54.5,24.6 r270 top locked
X2 "" USB-A 7.1,31.8 r270 top
X3 "DS1069-4M (CWF-4)" CWF-4 4,18.9 r0 top
X4 "PLS 3 x 2" pls-2,54-3x2-tht-v 53.2,44.64 r270 bottom
X5 "USB Type-C" USB4105-15-A-120 38.25,48.055 r0 bottom
Z1 "16 MГц" QSMD3.2x2.5 44.9,24.75 r180 bottom

## Footprints (in the part's own frame and the unit in brackets; to place one, negate y for a bottom-side part, rotate by r counter-clockwise, add the part's x,y. Pads: shape width x height; smd on the part's side, far side on the other; paste and mask are expansions set on the pad)
A6S-4102-H [mm]
  rrect50% 1.5x1.1 smd: 1(-4.45,3.81) 2(4.45,3.81) 3(-4.45,1.27) 4(4.45,1.27) 5(-4.45,-1.27) 6(4.45,-1.27) 7(-4.45,-3.81) 8(4.45,-3.81)
  silkscreen extent -2.87,-5.08 2.86,5.08, body extent -4.85,-5.64 4.95,5.46, height 3.7
C0603 [mm] "Chip Capacitor, 2-Leads, Body 1,60x0,80mm, IPC Medium Density"
  rrect50% 0.85x0.95 smd: 1(-0.675,0) 2(0.675,0)
  Top Layer pour cut-out: -0.254,0.5 -0.254,-0.5 0.254,-0.5 0.254,0.5
  silkscreen extent -1.35,-0.75 1.35,0.75, body extent -0.85,-0.45 0.85,0.45, height 0.9
C1206 [mm] "Chip Capacitor, 2-Leads, Body 3,20x1,60mm, IPC Medium Density"
  rrect50% 1.05x1.8 smd: 1(-1.525,0) 2(1.525,0)
  Top Layer pour cut-out: -0.6,0.95 -0.6,-0.95 0.6,-0.95 0.6,0.95
  silkscreen extent -2.3,-1.15 2.3,1.15, body extent -1.6,-0.8 1.6,0.8, height 1.25
CWF-4 [mm]
  rect 1.6x1.6 hole 1: 1(0,0)
  round 1.6 hole 1: 2(0,-2.5) 3(0,-5) 4(0,-7.5)
  silkscreen extent -3.5,-10 2.5,2.5, body extent -3.55,-9.95 2.2,2.45, height 7
"DO-41 Vertical" [mil]
  round 60 hole 30: 1(0,78.74) 2(0,0)
  silkscreen extent -53,-53 53,47, body extent -53,-53 53,96, height 281
it-1187 [mm]
  rect 1.4x1.4 smd: 1(-2.9,1.95) 1(2.9,1.95) 2(-2.9,-1.95) 2(2.9,-1.95)
  silkscreen extent -2.6,-2.6 2.6,2.6, body extent -3.2,-2.6 3.2,2.6, height 1.5
JUMPER_SOLDERED_3x1 [mm]
  rect 1x1 smd: 1(-1,0) 2(1,0)
  Top Layer region: -1.5,0.5 -0.3,0.5 0.2,0 -0.3,-0.5 -1.5,-0.5
  Top Layer region: 1.5,0.5 0,0.5 0.5,0 0,-0.5 1.5,-0.5
  silkscreen extent -1.8,-0.8 1.8,0.8
L0603 [mm] "Chip Inductor, 2-Leads, Body 1,60x0,80mm, IPC Medium Density"
  rect 0.85x0.95 smd: 1(-0.675,0) 2(0.675,0)
  silkscreen extent -1.35,-0.75 1.35,0.75, body extent -0.85,-0.45 0.85,0.45, height 0.9
OLED2.42-PLS2.54-1x7 [mm] "OLED 2.42inc, PLS2.54-1x7"
  round 6 hole 3.2: 0(-19.4,34) 0(-19.4,-34) 0(19.4,34) 0(19.4,-34)
  rect 1.9x1.9 hole 1: 1(-7.52,33.5)
  round 1.9 hole 1: 2(-4.98,33.5) 3(-2.44,33.5) 4(0.1,33.5) 5(2.64,33.5) 6(5.18,33.5) 7(7.72,33.5)
  silkscreen extent -21.4,-36 21.4,36, body extent -21.39,-36 21.41,36, height 7.44
pls-2,54-3x2-tht-v [mm]
  round 1.6 hole 0.9: 1(5.08,2.54) 2(5.08,0) 3(2.54,2.54) 4(2.54,0) 5(0,2.54)
  rect 1.6x1.6 hole 0.9: 6(0,0)
  silkscreen extent -1.31,-1.33 6.39,3.87
QSMD3.2x2.5 [mm]
  rect 1.3x1.1 smd: 1(-1.15,-0.9) 2(1.15,0.9) ""(-1.15,0.9) ""(1.15,-0.9)
  silkscreen extent -1.7,-1.35 1.7,1.35, body extent -1.64,-1.26 1.57,1.24, height 0.81
R0603 [mm]
  rect 0.7x1 smd: 1(-0.75,0) 2(0.75,0)
  silkscreen extent -1.33,-0.73 1.33,0.73, body extent -0.8,-0.43 0.8,0.43, height 0.45
SOD323 [mm]
  rect 0.6x0.8 smd: 1(-1.6,0) 2(0.75,0)
  silkscreen extent -2,-0.6 0.9,0.87, body extent -1.68,-0.68 0.82,0.67, height 1
TP_0,6X1 [mm]
  round 1 hole 0.6: 1(0,0)
UNIVERSAL_ATMEGA32U4 [mm]
  oval 1.5x0.5 smd: 1(-5.75,4)
  oval 0.9x0.3 smd: 1(-3.4,2.5)
  rect 1.5x0.5 smd: 2(-5.75,3.2) 3(-5.75,2.4) 4(-5.75,1.6) 5(-5.75,0.8) 6(-5.75,0) 7(-5.75,-0.8) 8(-5.75,-1.6) 9(-5.75,-2.4) 10(-5.75,-3.2) 11(-5.75,-4) 23(5.75,-4) 24(5.75,-3.2) 25(5.75,-2.4) 26(5.75,-1.6) 27(5.75,-0.8) 28(5.75,0) 29(5.75,0.8) 30(5.75,1.6) 31(5.75,2.4) 32(5.75,3.2) 33(5.75,4)
  rect 0.9x0.3 smd: 2(-3.4,2) 3(-3.4,1.5) 4(-3.4,1) 5(-3.4,0.5) 6(-3.4,0) 7(-3.4,-0.5) 8(-3.4,-1) 9(-3.4,-1.5) 10(-3.4,-2) 11(-3.4,-2.5) 23(3.4,-2.5) 24(3.4,-2) 25(3.4,-1.5) 26(3.4,-1) 27(3.4,-0.5) 28(3.4,0) 29(3.4,0.5) 30(3.4,1) 31(3.4,1.5) 32(3.4,2) 33(3.4,2.5)
  rect 0.5x1.5 smd: 12(-4,-5.75) 13(-3.2,-5.75) 14(-2.4,-5.75) 15(-1.6,-5.75) 16(-0.8,-5.75) 17(0,-5.75) 18(0.8,-5.75) 19(1.6,-5.75) 20(2.4,-5.75) 21(3.2,-5.75) 22(4,-5.75) 34(4,5.75) 35(3.2,5.75) 36(2.4,5.75) 37(1.6,5.75) 38(0.8,5.75) 39(0,5.75) 40(-0.8,5.75) 41(-1.6,5.75) 42(-2.4,5.75) 43(-3.2,5.75) 44(-4,5.75)
  rect 0.3x0.9 smd: 12(-2.5,-3.4) 13(-2,-3.4) 14(-1.5,-3.4) 15(-1,-3.4) 16(-0.5,-3.4) 17(0,-3.4) 18(0.5,-3.4) 19(1,-3.4) 20(1.5,-3.4) 21(2,-3.4) 22(2.5,-3.4) 34(2.5,3.4) 35(2,3.4) 36(1.5,3.4) 37(1,3.4) 38(0.5,3.4) 39(0,3.4) 40(-0.5,3.4) 41(-1,3.4) 42(-1.5,3.4) 43(-2,3.4) 44(-2.5,3.4)
  rect 5x5 smd: TP(0,0)
  silkscreen extent -6.1,-6.1 6.1,6.1, body extent -6,-6 6,6, height 1.1
USB4105-15-A-120 [mm] "USB Type-c 16p USB4105-15-A-120"
  rect 0.3x1.15 smd: 1(-1.75,7.355) 2(-1.25,7.355) 3(-0.75,7.355) 4(-0.25,7.355) 5(0.25,7.355) 6(0.75,7.355) 7(1.25,7.355) 8(1.75,7.355)
  rect 0.6x1.15 smd: 9(-2.4,7.355) 9(2.4,7.355) 10(-3.2,7.355) 10(3.2,7.355)
  oval 1x1.8 hole 0.6 slot 1.4 at 90 deg: TP(-4.32,2.6) TP(-4.32,6.78) TP(4.32,2.6) TP(4.32,6.78)
  round 0 hole 0.65 unplated: ""(-2.89,6.28) ""(2.89,6.28)
  silkscreen extent -4.47,0 4.47,5.65, body extent -4.47,0 4.47,7.7, height 3.26
USB-A [mm] "Универсальный разъем USB-A для поверхностного и сквохного монтажа"
  rrect50% 1.7x4 hole 1: 1(-3.5,3.525) 2(-1,3.525) 3(1,3.525) 4(3.5,3.525)
  rrect50% 3x4 hole 1 slot 2.5 at 90 deg: TP(-6.35,-3.525) TP(6.35,-3.525)
  silkscreen extent -7.75,-1.23 7.75,4, body extent -7.3,-6.98 7.3,3.62, height 6.95
VD0603 [mm]
  rect 0.7x1 smd: 1(-0.75,0) 2(0.75,0)
  Top Layer pour cut-out: -0.4,0.5 0.4,0.5 0.4,-0.5 -0.4,-0.5
  silkscreen extent -1.33,-0.73 1.8,0.73, body extent -0.82,-0.37 0.82,0.36, height 0.68